# Altium PCB Rectifer2.PcbDoc
Units mm, origin at the board's own origin, x right, y up, seen from the top; angles counter-clockwise.
Board outline 140 x 100 mm, 2 copper layers (Top Layer, Bottom Layer); 55 components, 26 nets, 125 pads, 76 vias.
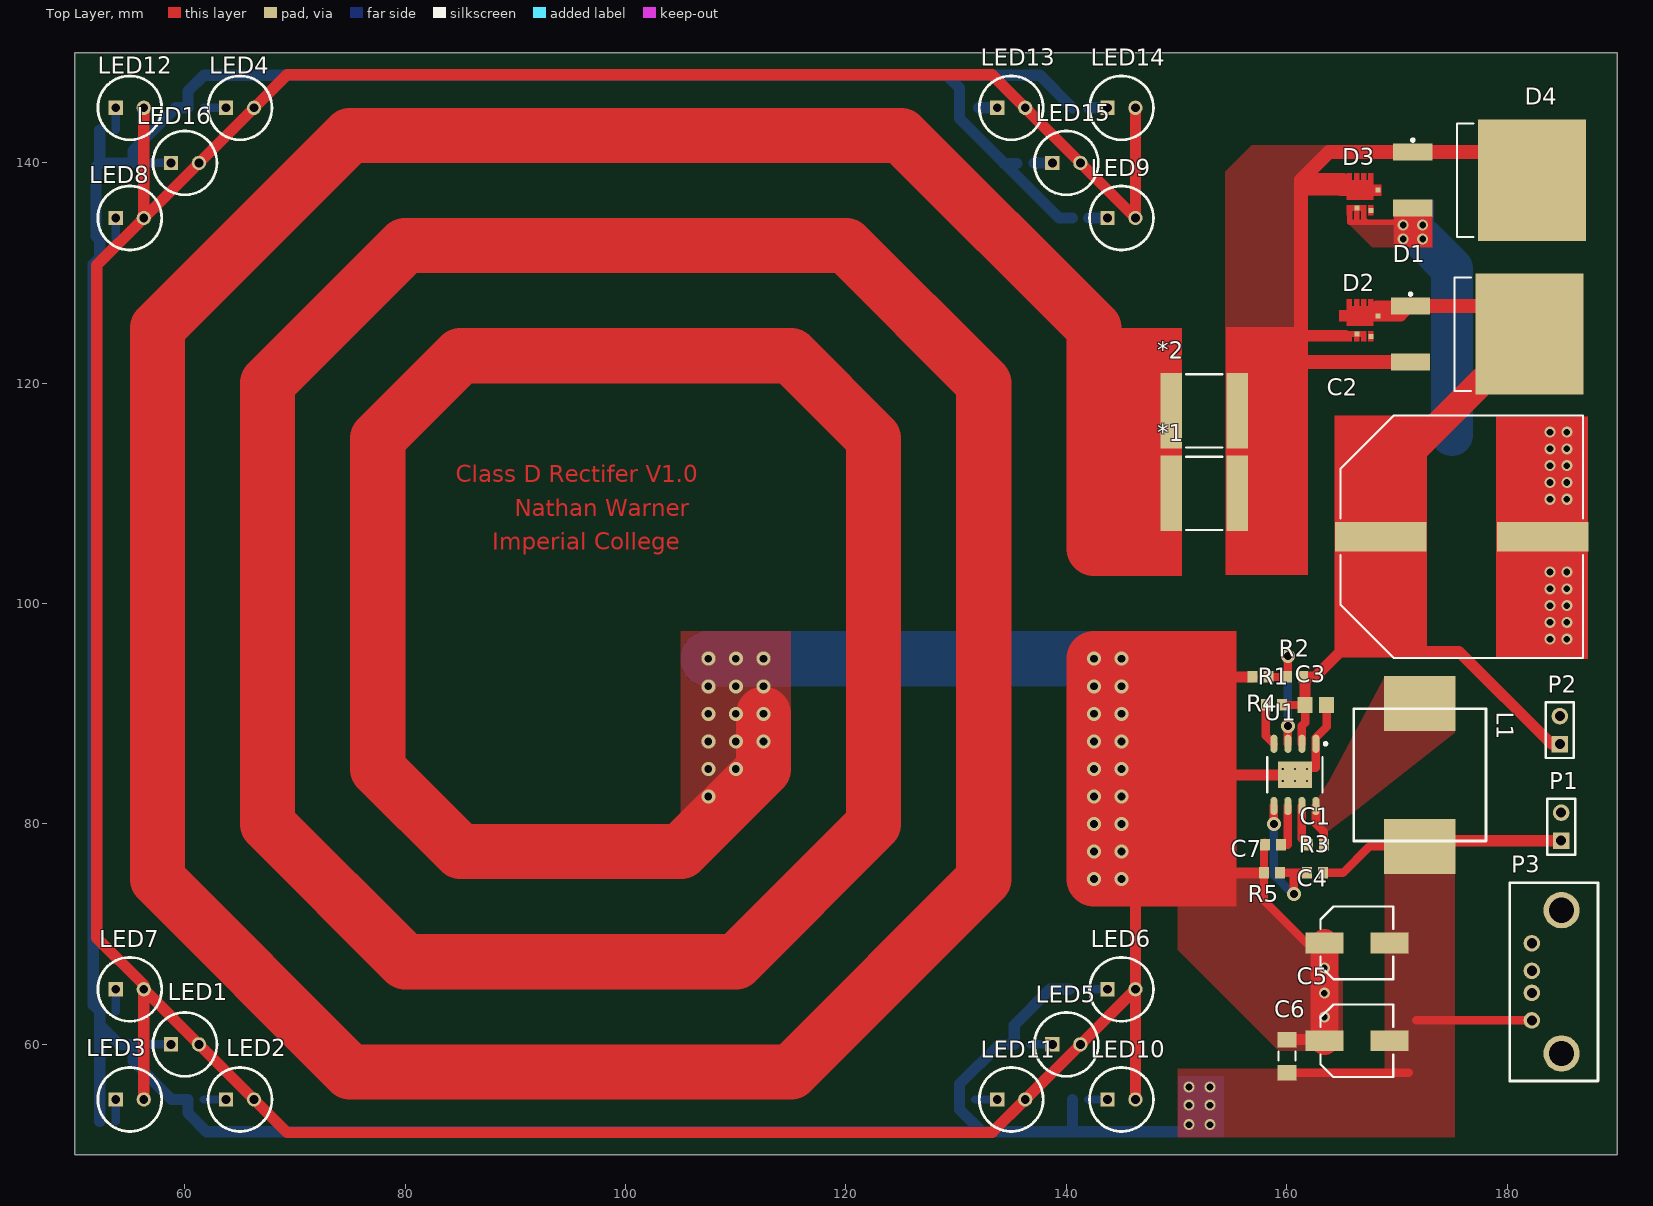
[diagram p0: Top Layer view]
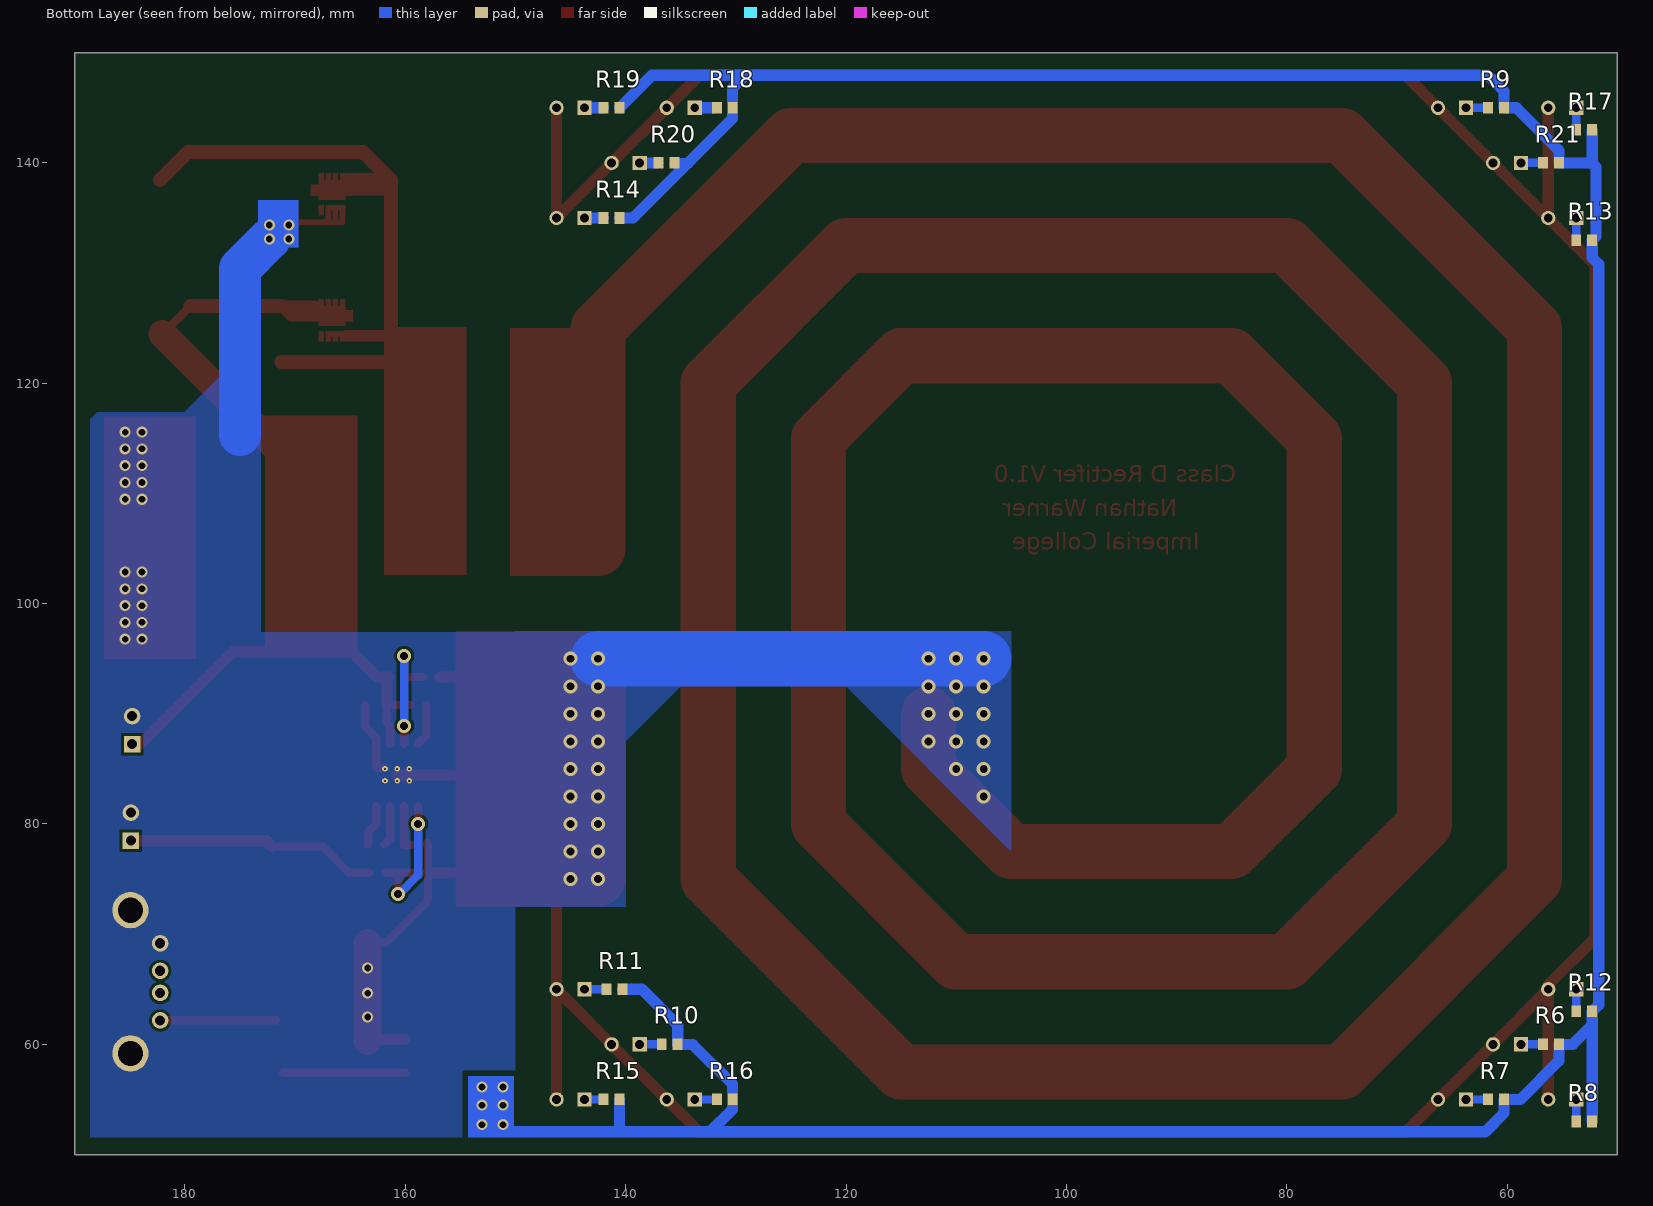
[diagram p1: Bottom Layer view, seen from below]

## Layer stack, top to bottom
Top Solder: solder mask 0.0102, Solder Resist, Dk 3.5
Top Layer: signal copper 0.0356
Dielectric 1: dielectric 0.32, FR-4, Dk 4.8
Bottom Layer: signal copper 0.0356
Bottom Solder: solder mask 0.0102, Solder Resist, Dk 3.5

## Board outline
50,50 50,150 190,150 190,50

## Design rules (kind name [scope] priority, off if disabled: settings)
Clearance Clearance_2 [InComponent('D2','D3')] p1: gap=0 ignorepadtopadclearanceinfootprint=FALSE
Clearance Clearance_1 [InComponent('U1')] p2: gap=0 ignorepadtopadclearanceinfootprint=FALSE
Clearance [All] p3: gap=0.254 ignorepadtopadclearanceinfootprint=FALSE except(0: Arc-Hole Track-Hole SMDPad-Hole THPad-Hole Via-Hole Fill-Hole Poly-Hole Region-Hole Text-Hole)
ComponentClearance [InComponent('LED1','LED10','LED11','LED12','LED13','LED14','LED14','LED15','LED16','LED2','LED3','LED4','LED5','LED6','LED7','LED8','LED9')] p1: gap=0 collisioncheckmode=3 verticalgap=0 showdistances=FALSE
PolygonConnect [All] p1: connectstyle=Direct reliefconductorwidth=0.254 reliefentries=4 polygonreliefangle="90 Angle" airgapwidth=0.254
RoutingVias [All] p1: holewidth=0.711 width=1.27 viastyle="Through Hole" minholewidth=0.711 minwidth=1.27 maxholewidth=0.711 maxwidth=1.27
SolderMaskExpansion [All] p1: expansion=0.102
Width [All] p1: maxlimit=5 minlimit=0.254 preferedwidth=1.016
29 further rules are at their usual default settings.

## Components (designator, comment, footprint, x,y, rotation, side; value= is the part's Value field where it differs from the comment)
*1 "CAP 2525" "CAP 2525" 152.5,110 r0 top
*2 "CAP 2525" "CAP 2525" 152.5,117.5 r0 top
C1 "Cap Semi" "0603 IPC Low Density" 162.645,78.105 r0 top value=10n
C2 "CAP SMD ELECT" "CAP 200UF" 205.279,100.67 r0 top
C3 "Cap Semi" "0805 IPC Low Density" 162.645,90.805 r180 top value=100n
C4 "CAP SMD ELECT" "CAP 47uF" 166.37,69.215 r0 top
C5 "CAP SMD ELECT" "CAP 47uF" 166.37,60.325 r0 top
C6 "Cap Semi" "1206 IPC Low Density" 160.02,58.928 r270 top value=100n
C7 "Cap Semi" "0603 IPC Low Density" 158.745,78.105 r0 top value=1uF
D1 "SiC Schottky Diode" TO-263-2 178.435,124.46 r0 top
D2 "SiC Schottky Diode" "QFN 3.3" 167.87,125.21 r180 top
D3 "SiC Schottky Diode" "QFN 3.3" 167.87,136.64 r180 top
D4 "SiC Schottky Diode" TO-263-2 178.645,138.43 r0 top
L1 "Inductor 220uH" "220u Indcutor small" 172.085,84.455 r0 top
LED1 "LED1" "LED 5MM" 60,60 r0 top
LED2 "LED1" "LED 5MM" 65,55 r0 top
LED3 "LED1" "LED 5MM" 55,55 r0 top
LED4 "LED1" "LED 5MM" 65,145 r0 top
LED5 "LED1" "LED 5MM" 140,60 r0 top
LED6 "LED1" "LED 5MM" 145,65 r0 top
LED7 "LED1" "LED 5MM" 55,65 r0 top
LED8 "LED1" "LED 5MM" 55,135 r0 top
LED9 "LED1" "LED 5MM" 145,135 r0 top
LED10 "LED1" "LED 5MM" 145,55 r0 top
LED11 "LED1" "LED 5MM" 135,55 r0 top
LED12 "LED1" "LED 5MM" 55,145 r0 top
LED13 "LED1" "LED 5MM" 135,145 r0 top
LED14 "LED1" "LED 5MM" 145,145 r0 top
LED15 "LED1" "LED 5MM" 140,140 r0 top
LED16 "LED1" "LED 5MM" 60,140 r0 top
P1 "Header 2" HDR1X2 184.912,78.486 r90 top
P2 "Header 2" HDR1X2 184.785,87.249 r90 top
P3 "USB 2.0" "USB 2.0" 182.245,65.675 r90 top
R1 "Res3" "RESISTOR 0603" 158.835,90.805 r180 top value=1K
R2 "Res3" "RESISTOR 0603" 160.74,93.345 r180 top value=1K
R3 "Res3" "RESISTOR 0603" 162.56,75.565 r0 top value=1K
R4 "Res3" "RESISTOR 0603" 157.607,93.345 r0 top value=1K
R5 "Res3" "RESISTOR 0603" 158.66,75.565 r0 top value=1K
R6 "Res3" "RESISTOR 0603" 56,60 r180 bottom value=1K
R7 "Res3" "RESISTOR 0603" 61,55 r180 bottom value=1K
R8 "Res3" "RESISTOR 0603" 53,53 r180 bottom value=1K
R9 "Res3" "RESISTOR 0603" 61,145 r180 bottom value=1K
R10 "Res3" "RESISTOR 0603" 136,60 r180 bottom value=1K
R11 "Res3" "RESISTOR 0603" 141,65 r180 bottom value=1K
R12 "Res3" "RESISTOR 0603" 53,63 r180 bottom value=1K
R13 "Res3" "RESISTOR 0603" 53,133 r180 bottom value=1K
R14 "Res3" "RESISTOR 0603" 141.275,135 r180 bottom value=1K
R15 "Res3" "RESISTOR 0603" 141.275,55 r180 bottom value=1K
R16 "Res3" "RESISTOR 0603" 131,55 r180 bottom value=1K
R17 "Res3" "RESISTOR 0603" 53,143 r180 bottom value=1K
R18 "Res3" "RESISTOR 0603" 131,145 r180 bottom value=1K
R19 "Res3" "RESISTOR 0603" 141.275,145 r180 bottom value=1K
R20 "Res3" "RESISTOR 0603" 136.275,140 r180 bottom value=1K
R21 "Res3" "RESISTOR 0603" 56,140 r180 bottom value=1K
U1 "LM5017" SOIC8_THERMAL 160.74,84.455 r270 top

## Footprints (in the part's own frame and the unit in brackets; to place one, negate y for a bottom-side part, rotate by r counter-clockwise, add the part's x,y. Pads: shape width x height; smd on the part's side, far side on the other; paste and mask are expansions set on the pad)
"220u Indcutor small" [mm]
  rect 6.5x5 smd paste+0 mask+0: 1(0,6.5) 2(0,-6.5)
  silkscreen extent -6,-6 6,6
"0603 IPC Low Density" [mm] "Chip Resistor, 0603, Body 1.60x0.80mm, IPC Low Density"
  rect 0.9x1.05 smd: 1(-0.725,0) 2(0.725,0)
  body extent -0.87,-0.48 0.87,0.48, height 0.6
"0805 IPC Low Density" [mm] "Chip Resistor, 0805, Body 2.00x1.25mm, IPC Low Density"
  rect 1.35x1.45 smd: 1(-0.975,0) 2(0.975,0)
  body extent -1.1,-0.67 1.1,0.67, height 0.7
"1206 IPC Low Density" [mm] "Chip Resistor, 1206, Body 3.20x1.60mm, IPC Low Density"
  rect 1.4x1.75 smd: 1(-1.5,0) 2(1.5,0)
  silkscreen extent -0.4,-0.77 0.4,0.77, body extent -1.63,-0.82 1.63,0.82, height 0.7
"CAP 47uF" [mm] "Aluminum Electrolytic Capacitor, Body 6.60x6.60x5.50mm, IPC Low Density"
  rect 3.45x1.9 smd: 1(-2.95,0) 2(2.95,0)
  silkscreen extent -3.3,-3.3 3.3,3.3, body extent -3.3,-3.3 3.3,3.3, height 5.5
"CAP 200UF" [mm] "Aluminum Electrolytic Capacitor, Body 21.50x21.50x22.00mm, IPC Low Density"
  rect 8.3x2.7 smd: A(-36.75,5.4) C(-22.05,5.4)
  silkscreen extent -40.4,-5.6 -18.4,16.4, body extent -40.4,-5.6 -18.4,16.4, height 22
"CAP 2525" [mm] "Chip Capacitor, 2-Leads, Body 6.35x6.35mm, IPC Low Density"
  rect 1.95x6.85 smd: 1(-3,0) 2(3,0)
  silkscreen extent -1.65,-3.32 1.65,3.32, body extent -3.43,-3.36 3.43,3.36, height 2.59
HDR1X2 [mm] "Connector; Header; 2 Position"
  rect 1.5x1.5 hole 0.9: 1(0,0)
  round 1.5 hole 0.9: 2(2.54,0)
  silkscreen extent -1.27,-1.27 3.81,1.27
"LED 5MM" [mm]
  rect 1.3x1.3 hole 0.8: A(-1.27,0)
  round 1.3 hole 0.8: K(1.27,0)
  silkscreen extent -2.9,-2.9 2.9,2.9
"QFN 3.3" [mm] "Cree Schottky"
  rect 0.45x0.45 smd paste+0 mask+0: A(1.5,0.75) C(-0.4,-0.9) NC(0.225,0.95)
  Top Layer region: 2.4,0.5 0.65,0.5 0.65,1.4 1.1,1.4 1.1,1 1.3,1 1.3,1.4 1.75,1.4 1.75,1 1.95,1 1.95,1.4 2.4,1.4
  Top Layer region: 0,0.5 0.45,0.5 0.45,1.4 0,1.4
  Top Layer region: 0,0 2.4,0 2.4,-0.4 3.1,-0.4 3.1,-1.4 2.4,-1.4 2.4,-2.4 1.95,-2.4 1.95,-1.8 1.75,-1.8 1.75,-2.4 1.3,-2.4 1.3,-1.8 1.1,-1.8 1.1,-2.4 0.65,-2.4 0.65,-1.8 0.45,-1.8 0.45,-2.4 0,-2.4 0,-1.4 -0.7,-1.4 -0.7,-0.4 0,-0.4
"RESISTOR 0603" [mm] "Chip Resistor, 0603, Body 1.60x0.80mm, IPC Low Density"
  rect 0.9x1.05 smd: 1(-0.725,0) 2(0.725,0)
  body extent -0.87,-0.48 0.87,0.48, height 0.6
SOIC8_THERMAL [mm] "SOIC, 8-Leads, Body 4.90x3.90mm, Pitch 1.27mm, Thermal Pad 3.10x2.41mm, IPC Low Density"
  oval 1.65x0.65 smd: 1(-2.825,1.905) 2(-2.825,0.635) 3(-2.825,-0.635) 4(-2.825,-1.905) 5(2.825,-1.905) 6(2.825,-0.635) 7(2.825,0.635) 8(2.825,1.905)
  rect 2.41x3.1 smd: 9(0,0)
  silkscreen extent -2.95,-2.5 1.6,2.91, body extent -2,-2.5 2,2.5, height 1.75
TO-263-2 [mm] "D2-PAK, 3-Pads, Body 7.80x8.50mm (max), IPC Low Density"
  rect 3.556x1.54 smd: A(-7.2,-2.54) C(-7.2,2.54)
  rect 9.8x11 smd: C(3.6,0)
  silkscreen extent -7.32,-5.15 -1.7,5.15, body extent -3.2,-5.15 6.2,5.15, height 4.57
"USB 2.0" [mm]
  round 1.5 hole 0.92: 1(-3.5,0) 2(-1,0) 3(1,0) 4(3.5,0)
  round 3.3 hole 2.3: 4(-6.5,-2.7) 4(6.5,-2.7)
  silkscreen extent -9,-6 9,2

## Part data
C1 C3 C6 C7: "Capacitor (Semiconductor SIM Model)", LatestRevisionDate=29-May-2009, LatestRevisionNote="IPC-7351 Footprint Added.", PackageDescription="Chip Capacitor", PackageReference=C1206, Published=8-Jun-2000, Publisher="Altium Limited"
D1 D2 D3 D4: "Cree Silicon Carbide Schottky Diode"
P1 P2: "Header, 2-Pin", LatestRevisionDate=17-Jul-2002, LatestRevisionNote="Re-released for DXP Platform.", Publisher="Altium Limited"
R1 R2 R3 R4 R5 R6 R7 R8 R9 R10 R11 R12 R13 R14 R15 R16 R17 R18 R19 R20 R21: "Resistor", LatestRevisionDate=29-May-2009, LatestRevisionNote="IPC-7351 Footprint Added.", PackageDescription="Chip Resistor", PackageReference=J1-0603, Published=8-Jun-2000, Publisher="Altium Limited"

## Via types
v1: diameter 1.27, hole 0.711, Top Layer to Bottom Layer, 37 vias
v2: diameter 1, hole 0.6, Top Layer to Bottom Layer, 33 vias
v3: diameter 0.5, hole 0.2, Top Layer to Bottom Layer, 6 vias

## Nets (pads, with @x,y where several pads share a name; then routed paths per layer and width w, separated by ;. In a path a pad name is that pad's centre, name@x,y a point inside that pad or via, vN(x,y) a via of type N, cw(c..) or ccw(c..) an arc to the next point about the centre after c; other vN are vias at no path point)
+5V: C4.2 C5.2 C6.2 L1.2 P1.1 P3.1 R3.2 R6.2 R7.2 R8.2 R9.2 R10.2 R11.2 R12.2 R13.2 R14.2 R15.2 R16.2 R17.2 R18.2 R19.2 R20.2 R21.2 | length 376.4
  Top Layer w0.762: C6.2 171.093,57.428 ; R3.2 165.1,75.565 167.49,77.955 L1.2 ; 171.751,62.175 P3.1
  Top Layer w1.016: L1.2 172.616,78.486 P1.1
  Bottom Layer w0.762: 150.495,52.07 v2(151.13,52.705)
  Bottom Layer w1.016: R8.2 52.275,61.771 ; R17.2 52.275,139.954 ; R20.2@135.509,139.954 134.366,139.954 ; R11.2 138.533,65 135.275,61.742 R10.2 133.914,60 130.302,56.388 130.302,54.102 132.334,52.07 ; R15.2 140.55,52.109 140.589,52.07 ; R14.2 139.32,135 134.366,139.954 ; R19.2 137.595,147.955 129.159,147.955 ; 150.495,52.07 140.589,52.07 ; 52.275,61.771 R12.2 51.689,63.586 51.689,130.81 52.275,131.396 R13.2 51.943,133.332 51.943,139.622 52.275,139.954 ; 52.275,61.771 54.046,60 R6.2 55.275,58.517 58.792,55 R7.2 60.275,53.771 61.976,52.07 132.334,52.07 ; 52.275,139.954 52.321,140 R21.2 55.275,141.127 59.148,145 R9.2 60.275,146.508 61.722,147.955 129.159,147.955 ; 129.159,147.955 130.302,146.812 130.302,144.018 134.366,139.954 ; 132.334,52.07 140.589,52.07
  other v2: 153.035,52.705 151.13,54.483 153.035,54.483 151.13,56.134 153.035,56.134
COIL: *1.1 *2.1 C2.C C3.1 C4.1 C5.1 C6.1 C7.1 D3.A D4.A LED1.K LED2.K LED3.K LED4.K LED5.K LED6.K LED7.K LED8.K LED9.K LED10.K LED11.K LED12.K LED13.K LED14.K LED15.K LED16.K P1.2 P2.2 P3.4 R4.1 R5.1 U1.1 U1.9 | length 1103
  Top Layer w0.508: 165.735,135.89 165.735,134.62 166.37,134.62 ; D3.A 166.37,134.62 ; 167.005,135.89 167.005,134.874 167.259,134.62 ; 169.799,134.62 167.259,134.62 ; 166.37,134.62 167.259,134.62
  Top Layer w0.762: C7.1@158.02,78.285 C7.1 157.935,78.02 R5.1 157.935,73.065 161.785,69.215 C4.1 ; U1.9@161.925,85.09 162.645,85.09 U1.1 162.645,87.842 163.62,88.817 C3.1 ; C5.1@163.245,60.5 C5.1
  Top Layer w1.016: LED3.K LED7.K ; LED12.K LED8.K ; LED10.K LED6.K ; 146.27,74.73 LED6.K ; LED14.K LED9.K LED15.K LED13.K 133.27,148 69.27,148 LED4.K LED16.K LED8.K ; 148.59,84.455 U1.9 ; 154.432,75.565 R5.1 ; 154.94,93.345 R4.1 ; C6.1 163.173,60.428 C5.1@163.245,60.5 ; LED7.K LED1.K LED2.K 69.27,52 133.27,52 LED11.K LED5.K LED6.K ; LED7.K 56.27,65.396 52,69.666 52,130.73 LED8.K
  Top Layer w2.54: C5.1 v2(163.42,62.484) v2(163.42,64.643) v2(163.42,66.929) C4.1
  Top Layer w5: v1(112.5,90) v1(112.5,87.5) 112.5,85 105,77.5 85,77.5 77.5,85 77.5,115 85,122.5 115,122.5 122.5,115 122.5,80 110,67.5 80,67.5 67.5,80 67.5,120 80,132.5 120,132.5 132.5,120 132.5,75 115,57.5 75,57.5 57.5,75 57.5,125 75,142.5 125,142.5 142.5,125 142.5,105 ; v1(142.5,75) v1(142.5,77.5) v1(142.5,80) v1(142.5,82.5) v1(142.5,85) v1(142.5,87.5) v1(142.5,90) v1(142.5,92.5) v1(142.5,95)
  Bottom Layer w3.81: v2(172.339,133.096) 175.006,130.429 175.006,115.316
  Bottom Layer w5: v1(107.5,95) v1(110,95) v1(112.5,95) v1(142.5,95)
  other v1: 145,75 145,77.5 145,80 107.5,82.5 145,82.5 107.5,85 110,85 145,85 107.5,87.5 110,87.5 145,87.5 107.5,90 110,90 145,90 107.5,92.5 110,92.5 112.5,92.5 145,92.5 145,95
  other v2: 183.896,96.774 185.42,96.774 183.896,98.298 185.42,98.298 183.896,99.822 185.42,99.822 183.896,101.346 185.42,101.346 183.896,102.87 185.42,102.87 183.896,109.474 185.42,109.474 183.896,110.998 185.42,110.998 183.896,112.522 185.42,112.522 183.896,114.046 185.42,114.046 183.896,115.57 185.42,115.57 170.561,133.096 170.561,134.366 172.339,134.366
Net*1_2: *1.2 *2.2 D1.A D2.A D3.C D4.C | length 71.3
  Top Layer w1.016: 161.29,137.16 161.67,137.54 167.385,137.54 ; 161.62,124.308 165.303,124.308
  Top Layer w1.27: *2.2 158.14,117.5 161.29,120.65 161.29,121.92 ; 160.496,123.349 160.496,121.92 161.29,121.92 ; 161.29,124.46 161.29,137.16 161.29,138.43 ; 165.1,138.43 161.29,138.43 ; D1.A 161.29,121.92 ; D4.C@182.245,138.43 179.705,140.97 171.445,140.97 163.83,140.97 161.29,138.43
NetC1_1: C1.1 U1.7 | length 3.8
  Top Layer w0.762: U1.7 161.375,78.65 C1.1
NetC1_2: C1.2 L1.1 U1.8 | length 3.8
  Top Layer w0.762: U1.8 162.645,80.01 163.37,79.285 C1.2
NetC2_A: C2.A C3.2 D1.C D2.C P2.1 R1.1 R2.1 U1.2 | length 74.7
  Top Layer w0.762: R1.1 C3.2 161.67,89.195 161.375,88.9 U1.2 ; D1.C@179.495,127 D1.C@182.035,124.46
  Top Layer w1.016: C3.2 161.67,93.14 R2.1 162.56,93.345 168.529,99.314 C2.A ; 168.148,127 171.235,127 170.345,126.11 D2.C ; 171.958,95.631 175.641,95.631 184.023,87.249 P2.1
  Top Layer w1.27: D1.C@171.235,127 D1.C@179.495,127
  Top Layer w2.54: 171.113,113.538 D1.C@182.035,124.46
NetC7_2: C7.2 U1.6 | length 4.2
  Top Layer w0.762: C7.2 160.105,78.105 U1.6
NetLED1_A: LED1.A R6.1 | length 2
  Bottom Layer w0.762: R6.1 LED1.A
NetLED2_A: LED2.A R7.1 | length 2
  Bottom Layer w0.762: R7.1 LED2.A
NetLED3_A: LED3.A R8.1 | length 2
  Bottom Layer w0.762: R8.1 53.725,54.995 LED3.A
NetLED4_A: LED4.A R9.1 | length 2
  Bottom Layer w0.762: R9.1 LED4.A
NetLED5_A: LED5.A R10.1 | length 2
  Bottom Layer w0.762: R10.1 LED5.A
NetLED6_A: LED6.A R11.1 | length 2
  Bottom Layer w0.762: R11.1 LED6.A
NetLED7_A: LED7.A R12.1 | length 2
  Bottom Layer w0.762: R12.1 53.73,63.005 LED7.A
NetLED8_A: LED8.A R13.1 | length 2
  Bottom Layer w0.762: R13.1 53.73,133.005 LED8.A
NetLED9_A: LED9.A R14.1 | length 1.7
  Bottom Layer w1.016: R14.1 LED9.A
NetLED10_A: LED10.A R15.1 | length 1.7
  Bottom Layer w0.762: R15.1 LED10.A
NetLED11_A: LED11.A R16.1 | length 2
  Bottom Layer w0.762: R16.1 LED11.A
NetLED12_A: LED12.A R17.1 | length 2
  Bottom Layer w0.762: R17.1 53.73,143.005 LED12.A
NetLED13_A: LED13.A R18.1 | length 1.7
  Bottom Layer w1.016: R18.1@132.046,145 LED13.A
NetLED14_A: LED14.A R19.1 | length 1.7
  Bottom Layer w1.016: R19.1 LED14.A
NetLED15_A: LED15.A R20.1 | length 1.7
  Bottom Layer w1.016: R20.1@137.079,140 LED15.A
NetLED16_A: LED16.A R21.1 | length 2
  Bottom Layer w0.762: R21.1 LED16.A
NetR1_2: R1.2 U1.4 | length 3.8
  Top Layer w0.762: R1.2 158.11,88.005 U1.4
NetR2_2: R2.2 R4.2 U1.3 | length 11.6
  Top Layer w0.762: R4.2 R2.2 160.105,93.435 v1(160.105,95.25) ; U1.3 v1(160.105,88.9)
  Bottom Layer w0.762: v1(160.105,88.9) v1(160.105,95.25)
NetR3_1: R3.1 R5.2 U1.5 | length 13.3
  Top Layer w0.762: v1(158.835,80.01) U1.5 ; R5.2 160.655,75.565 ; v1(160.655,73.66) 160.655,75.565 ; R3.1 160.655,75.565
  Bottom Layer w0.762: v1(158.835,80.01) 158.835,75.353 160.655,73.533 v1(160.655,73.66)
pads on no net: D2.NC D3.NC P3.2 P3.3
copper on no net:
  other v3: 159.64,83.905 160.74,83.905 161.84,83.905 159.64,85.005 160.74,85.005 161.84,85.005

## Polygon pours and split planes (outlines as drawn)
+5V on Top Layer "Top Layer-No Net" (solid, pour order 14): 175.26,80.01 175.26,57 168.91,57 168.91,80.01
NetC1_2 on Top Layer "Top Layer-No Net" (solid, pour order 12): 175.26,93.345 175.26,88.265 166.37,81.28 163.83,79.375 163.195,79.375 162.56,80.01 162.56,81.915 163.83,83.82 168.91,93.345
Net*1_2 on Top Layer "Top Layer-No Net" (solid, pour order 18): 161.925,125.095 154.425,125.095 154.425,139.185 156.845,141.605 163.83,141.605 163.83,140.97 161.925,139.065
COIL on Top Layer "Top Layer-No Net" (solid, pour order 20): 165.481,134.62 167.767,132.334 169.672,132.334 169.672,134.493 169.799,134.62
COIL on Top Layer "Top Layer-No Net" (solid, pour order 0): 115,97.5 105,97.5 105,77.5 115,87.5
+5V on Top Layer "Top Layer-No Net" (solid, pour order 26): 175.26,57.785 175.26,51.562 149.987,51.562 150.114,51.689 150.114,57.785
COIL on Top Layer "Top Layer-No Net" (solid, pour order 28): 165.1,59.436 159.258,59.436 150.114,68.58 150.114,75.057 157.734,75.057 157.935,74.856 157.935,72.951 165.1,65.786
COIL on Bottom Layer "Top Layer-No Net" (solid, pour order 10): 135,97.5 150,97.5 150,72.5 140,72.5 140,87.5 135,92.5
COIL on Bottom Layer "Top Layer-No Net" (solid, pour order 8): 105,97.5 105,77.5 120,92.5 120,97.5
COIL on Bottom Layer "Top Layer-No Net" (solid, pour order 22): 154.813,51.562 154.813,57.531 154.686,57.658 150,57.658 150,97.409 173.101,97.409 173.101,117.348 187.96,117.348 188.595,116.713 188.595,51.562
COIL on Bottom Layer "Top Layer-No Net" (solid, pour order 24): 176.022,121.412 176.022,116.84 180.594,116.84

## Other copper
Top Layer:
  rectangle net Net*1_2: 154.425,102.595 161.925,125.095
  rectangle net COIL: 142.5,72.5 155.448,97.5
  rectangle net COIL: 142.5,102.5 150.495,125
  rectangle net COIL: 179,94.996 187.325,117
  rectangle net COIL: 169.672,132.334 173.228,136.652
  rectangle net NetC2_A: 164.338,95.123 172.72,117.094
  text "Class D Rectifer V1.0" at 84.582,110.998 h1.52
  text "Nathan Warner" at 89.916,107.95 h1.52
  text "Imperial College" at 87.884,104.902 h1.52
Bottom Layer:
  rectangle net COIL: 169.672,132.334 173.355,136.652
  rectangle net +5V: 150.114,51.562 154.305,57.15

## Silkscreen, mask and mechanical layers (free items; w line width, h text height)
Mechanical 1:
  the board outline again, w0.254
Drill Drawing:
  lines w0.254: 110,0 120,0